# EAGLE board main (EAGLE 8.7.1)
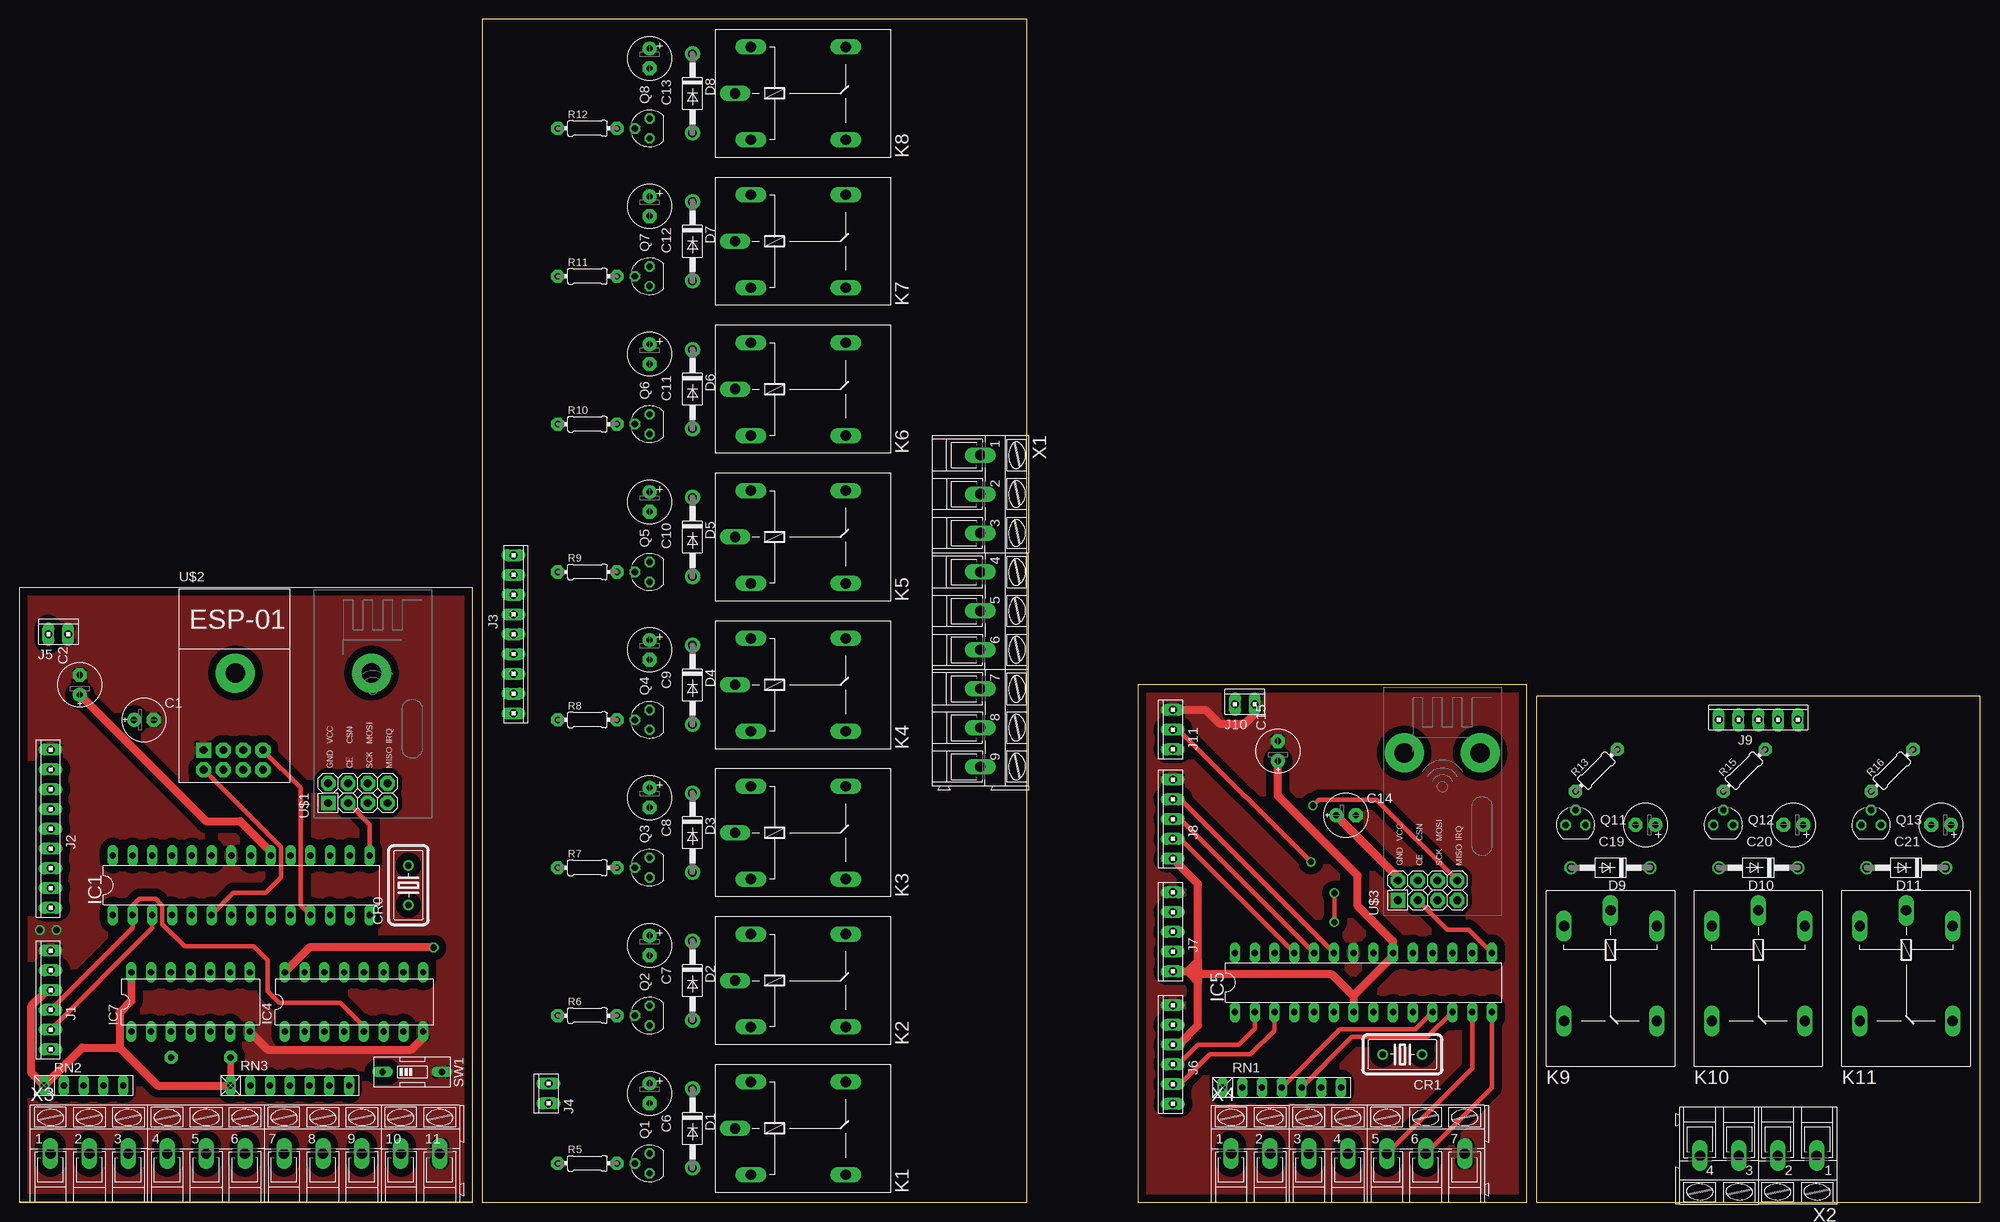
[diagram p0: board, top side]
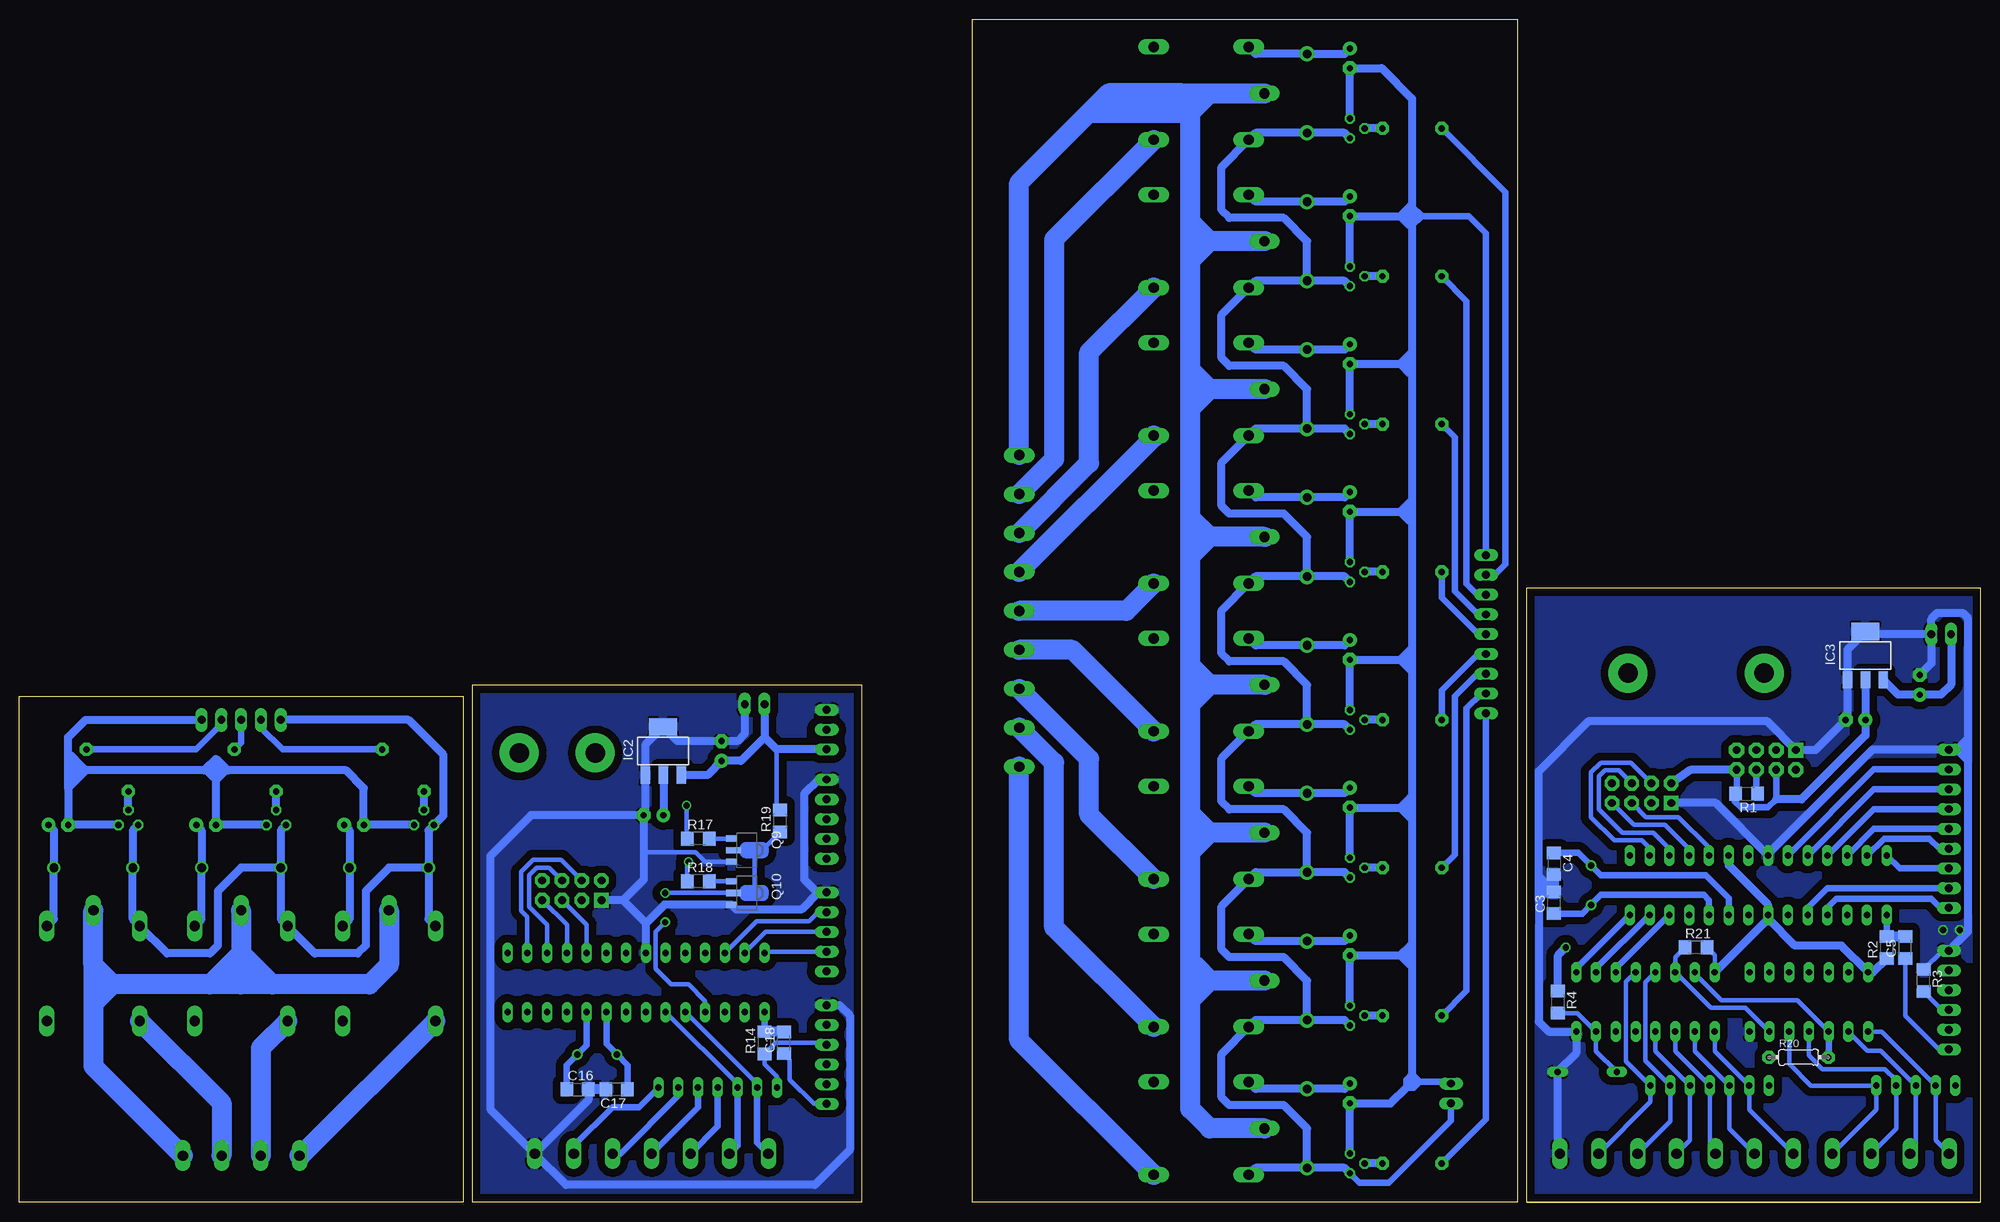
[diagram p1: board, bottom side, seen from below]

Size 252 x 152 mm. Coordinates in mm from the lower left corner, seen from the top.
Outline: 0,0 58.25,0
Outline: 58.25,0 0,0
Outline: 58.25,0 58.25,79 0,79 0,0
Outline: 129.5,0 129.5,152 59.5,152 59.5,0 129.5,0
Outline: 143.75,0 193.75,0 193.75,66.5 143.75,66.5 143.75,0
Outline: 195,0 252,0 252,65 195,65 195,0
Copper layers (1*16): Top 0.035mm / dielectric 1.5mm / Bottom 0.035mm
Design rules "default": minimum track width 6mil, minimum drill 0.35mm, track to track 6mil, track to pad 6mil, pad to pad 6mil, via to via 6mil, smd to smd 6mil, copper to edge 40mil, drill to drill 6mil, minimum pad ring 10mil, minimum via ring 8mil, stop-mask expansion 4mil, vias tented up to drill 0mil, thermal gap 10mil

## Footprints (pad centres in the part's own frame; a part is rotated, then mirrored left to right if it is on the bottom)
E2,5-6E = drill 0.813 pad 1.778: + -1.27,0 | drill 0.813 pad 1.778 octagon: - 1.27,0
C1206 = smd 1.6 x 1.8: 1 -1.4,0; 2 1.4,0
E2,5-6 = drill 0.813 pad 1.778: + -1.27,0 | drill 0.813 pad 1.778 octagon: - 1.27,0
HC18U-V = drill 0.813: 1 -2.54,0; 2 2.54,0
DO41-10 = drill 1.118 pad 1.93: A 5.08,0; C -5.08,0
DO41-10' = drill 1.118: A 5.08,0; C -5.08,0
DIL28-3 = drill 0.813 long: 1 -16.51,-3.81; 2 -13.97,-3.81; 3 -11.43,-3.81; 4 -8.89,-3.81; 5 -6.35,-3.81; 6 -3.81,-3.81; 7 -1.27,-3.81; 8 1.27,-3.81; 9 3.81,-3.81; 10 6.35,-3.81; 11 8.89,-3.81; 12 11.43,-3.81; 13 13.97,-3.81; 14 16.51,-3.81; 15 16.51,3.81; 16 13.97,3.81; 17 11.43,3.81; 18 8.89,3.81; 19 6.35,3.81; 20 3.81,3.81; 21 1.27,3.81; 22 -1.27,3.81; 23 -3.81,3.81; 24 -6.35,3.81; 25 -8.89,3.81; 26 -11.43,3.81; 27 -13.97,3.81; 28 -16.51,3.81
SOT223 = smd 1.219 x 2.235: 1 -2.311,-3.099; 2 0,-3.099; 3 2.311,-3.099 | smd 3.6 x 2.2: TAB 0,3.099
DIL16 = drill 0.813 long: 1 -8.89,-3.81; 2 -6.35,-3.81; 3 -3.81,-3.81; 4 -1.27,-3.81; 5 1.27,-3.81; 6 3.81,-3.81; 7 6.35,-3.81; 8 8.89,-3.81; 9 8.89,3.81; 10 6.35,3.81; 11 3.81,3.81; 12 1.27,3.81; 13 -1.27,3.81; 14 -3.81,3.81; 15 -6.35,3.81; 16 -8.89,3.81
DIL14 = drill 0.813 long: 1 -7.62,-3.81; 2 -5.08,-3.81; 3 -2.54,-3.81; 4 0,-3.81; 5 2.54,-3.81; 6 5.08,-3.81; 7 7.62,-3.81; 8 7.62,3.81; 9 5.08,3.81; 10 2.54,3.81; 11 0,3.81; 12 -2.54,3.81; 13 -5.08,3.81; 14 -7.62,3.81
10X06MTA = drill 1.016 long: 1 6.35,0; 2 3.81,0; 3 1.27,0; 4 -1.27,0; 5 -3.81,0; 6 -6.35,0
10X09MTA = drill 1.016 long: 1 10.16,0; 2 7.62,0; 3 5.08,0; 4 2.54,0; 5 0,0; 6 -2.54,0; 7 -5.08,0; 8 -7.62,0; 9 -10.16,0
10X02MTA = drill 1.016 long: 1 1.27,0; 2 -1.27,0
10X05MTA = drill 1.016 long: 1 5.08,0; 2 2.54,0; 3 0,0; 4 -2.54,0; 5 -5.08,0
10X03MTA = drill 1.016 long: 1 2.54,0; 2 0,0; 3 -2.54,0
G5LE = drill 1.321 long: 1 -7.493,-5.969; 2 -7.493,5.969; O 4.699,5.969; P -9.525,0; S 4.699,-5.969
SOT54A = drill 0.813 octagon: B 0,1.905; C -1.27,0; E 1.27,0
SOT89-BCE = smd 0.8 x 1.4: B -1.499,-1.981; E 1.499,-1.981 | smd 0.8 x 1.9: C 0,-1.727
R1206 = smd 1.6 x 1.803: 1 -1.422,0; 2 1.422,0
0204/7 = drill 0.813 pad 1.676 octagon: 1 -3.81,0; 2 3.81,0
RN-7 = drill 0.813 long: 1 -7.62,0; 2 -5.08,0; 3 -2.54,0; 4 0,0; 5 2.54,0; 6 5.08,0; 7 7.62,0
RN-5 = drill 0.813 long: 1 -5.08,0; 2 -2.54,0; 3 0,0; 4 2.54,0; 5 5.08,0
EDG-01 = drill 0.813 long: 1 0,-3.81; 2 0,3.81
NRF24L01+ = drill 1.016 pad 1.88 octagon: CE -11.43,1.27; CSN -8.89,1.27; IRQ -8.89,-3.81; MISO -11.43,-3.81; MOSI -8.89,-1.27; SCK -11.43,-1.27; VCC -8.89,3.81 | drill 1.016 pad 1.88 square: GND -11.43,3.81
ESP01 = drill 1 pad 1.93 octagon: CH_PD -1.285,-8.178; GPIO0 1.255,-5.638; GPIO2 -1.285,-5.638; RST 1.255,-8.178; RX 3.795,-5.638; TX -3.825,-8.178; VCC 3.795,-8.178 | drill 1 pad 1.93 square: GND -3.825,-5.638
AK300/9 = drill 1.321 long: 1 -20.015,0; 2 -15.011,0; 3 -10.008,0; 4 -5.004,0; 5 0,0; 6 5.004,0; 7 10.008,0; 8 15.011,0; 9 20.015,0
AK300/4 = drill 1.321 long: 1 -7.493,0; 2 -2.515,0; 3 2.515,0; 4 7.493,0
AK300/11 = drill 1.321 long: 1 -25.019,0; 2 -20.015,0; 3 -15.011,0; 4 -10.008,0; 5 -5.004,0; 6 0,0; 7 5.004,0; 8 10.008,0; 9 15.011,0; 10 20.015,0; 11 25.019,0
AK300/7 = drill 1.321 long: 1 -15.011,0; 2 -10.008,0; 3 -5.004,0; 4 0,0; 5 5.004,0; 6 10.008,0; 7 15.011,0

## Placement (x,y rotation side)
C1  [E2,5-6E]  16,62 0 top
C2  [E2,5-6E]  7.75,66.5 90 top
C3  [C1206]  54.75,38.5 90 bottom
C4  [C1206]  54.75,43.5 270 bottom
C5  [C1206]  9.62,32.75 90 bottom
C6  [E2,5-6]  81,14 270 top
C7  [E2,5-6]  81,33 270 top
C8  [E2,5-6]  81,52 270 top
C9  [E2,5-6]  81,71 270 top
C10  [E2,5-6]  81,90 270 top
C11  [E2,5-6]  81,109 270 top
C12  [E2,5-6]  81,128 270 top
C13  [E2,5-6]  81,147 270 top
C14  100uF  [E2,5-6E]  170.5,49.75 0 top
C15  10uF  [E2,5-6E]  161.75,58 90 top
C16  [C1206]  180.25,14.5 0 bottom
C17  [C1206]  175.25,14.5 180 bottom
C18  100nF  [C1206]  153.75,20.5 90 bottom
C19  [E2,5-6]  209,48.5 180 top
C20  [E2,5-6]  228,48.5 180 top
C21  [E2,5-6]  247,48.5 180 top
CR0  16MHz  [HC18U-V]  50,40.75 90 top
CR1  16MHz  [HC18U-V]  177.75,19 180 top
D1  1N4004  [DO41-10]  86.5,9.5 270 top
D2  1N4004  [DO41-10]  86.5,28.5 270 top
D3  1N4004  [DO41-10]  86.5,47.5 270 top
D4  1N4004  [DO41-10]  86.5,66.5 270 top
D5  1N4004  [DO41-10]  86.5,85.5 270 top
D6  1N4004  [DO41-10]  86.5,104.5 270 top
D7  1N4004  [DO41-10]  86.5,123.5 270 top
D8  1N4004  [DO41-10]  86.5,142.5 270 top
D9  1N4004  [DO41-10']  204.5,43 180 top
D10  1N4004  [DO41-10']  223.5,43 180 top
D11  1N4004  [DO41-10']  242.5,43 180 top
IC1  ATMEGA328-20P  [DIL28-3]  28.5,40.75 0 top
IC2  LM1117IMPX-3.3  [SOT223]  169.25,58 0 bottom
IC3  LM1117IMPX-3.3  [SOT223]  14.75,70.25 0 bottom
IC4  74LS151N  [DIL16]  43,25.75 0 top
IC5  ATMEGA328-20P  [DIL28-3]  172.75,28.25 0 top
IC7  74LS86N  [DIL14]  22,25.75 0 top
J1  [10X06MTA]  4,26 90 top
J2  [10X09MTA]  4,48 90 top
J3  [10X09MTA]  63.5,73 270 top
J4  [10X02MTA]  68,14 90 top
J5  [10X02MTA]  5,73 0 top
J6  [10X06MTA]  148.25,19 90 top
J7  [10X05MTA]  148.25,34.75 90 top
J8  [10X05MTA]  148.25,49.25 90 top
J9  [10X05MTA]  223.5,62 0 top
J10  [10X02MTA]  157.5,64 0 top
J11  [10X03MTA]  148.25,60.75 90 top
K1  G5L  [G5LE]  101.5,9.5 0 top
K2  G5L  [G5LE]  101.5,28.5 0 top
K3  G5L  [G5LE]  101.5,47.5 0 top
K4  G5L  [G5LE]  101.5,66.5 0 top
K5  G5L  [G5LE]  101.5,85.5 0 top
K6  G5L  [G5LE]  101.5,104.5 0 top
K7  G5L  [G5LE]  101.5,123.5 0 top
K8  G5L  [G5LE]  101.5,142.5 0 top
K9  G5L  [G5LE]  204.5,28 270 top
K10  G5L  [G5LE]  223.5,28 270 top
K11  G5L  [G5LE]  242.5,28 270 top
Q1  BC547  [SOT54A]  81,5 90 top
Q2  BC547  [SOT54A]  81,24 90 top
Q3  BC547  [SOT54A]  81,43 90 top
Q4  BC547  [SOT54A]  81,62 90 top
Q5  BC547  [SOT54A]  81,81 90 top
Q6  BC547  [SOT54A]  81,100 90 top
Q7  BC547  [SOT54A]  81,119 90 top
Q8  BC547  [SOT54A]  81,138 90 top
Q9  [SOT89-BCE]  158.5,45.25 270 bottom
Q10  [SOT89-BCE]  158.5,39.75 270 bottom
Q11  BC547  [SOT54A]  200,48.5 0 top
Q12  BC547  [SOT54A]  219,48.5 0 top
Q13  BC547  [SOT54A]  238,48.5 0 top
R1  [R1206]  30,52.5 180 bottom
R2  [R1206]  12,32.75 90 bottom
R3  [R1206]  7.25,28.5 270 bottom
R4  [R1206]  54.25,25.75 270 bottom
R5  [0204/7]  73,5 0 top
R6  [0204/7]  73,24 0 top
R7  [0204/7]  73,43 0 top
R8  [0204/7]  73,62 0 top
R9  [0204/7]  73,81 0 top
R10  [0204/7]  73,100 0 top
R11  [0204/7]  73,119 0 top
R12  [0204/7]  73,138 0 top
R13  [0204/7]  202.69,55.5 45 top
R14  [R1206]  156.25,20.5 90 bottom
R15  [0204/7]  221.69,55.5 45 top
R16  [0204/7]  240.69,55.5 45 top
R17  [R1206]  164.75,46.75 0 bottom
R18  [R1206]  164.75,41.25 0 bottom
R19  [R1206]  154.25,49 90 bottom
R20  [0204/7]  23.32,18.62 0 bottom
R21  [R1206]  36.5,32.75 0 bottom
RN1  [RN-7]  162.25,14.75 0 top
RN2  [RN-5]  8.25,15 0 top
RN3  [RN-7]  34.75,15 0 top
SW1  [EDG-01]  50.5,16.75 270 top
U$1  NRF24L01+  [NRF24L01+]  43.5,62.75 90 top
U$2  ESP01  [ESP01]  27.5,63.75 0 top
U$3  NRF24L01+  [NRF24L01+]  181,50.25 90 top
X1  [AK300/9]  123.5,76 270 top
X2  [AK300/4]  223.5,6 180 top
X3  [AK300/11]  29,6.25 0 top
X4  [AK300/7]  170.75,6.25 0 top

## Library data of the parts
C1-C21 D1-D8 R1-R21 = adafruit
CR0 CR1 = adafruit; OC_FARNELL: unknown; OC_NEWARK: unknown
D9-D11 = diode
IC1 IC5 = atmega328
IC2 IC3 = lm1117
IC4 IC7 = 74xx-us
J1-J11 = con-amp
K1-K11 = relay; OC_FARNELL: unknown; OC_NEWARK: unknown
Q1-Q8 Q11-Q13 = transistor-small-signal
Q9 Q10 = transistor
RN1-RN3 = resistor-net; OC_FARNELL: unknown; OC_NEWARK: unknown
SW1 = special
U$1 U$3 = nrf24l01
U$2 = esp8266
X1-X4 = con-ptr500; OC_FARNELL: unknown; OC_NEWARK: unknown

## Nets
3V3: C1.+ IC3.2 R1.2 U$1.VCC U$2.CH_PD U$2.VCC
3V3@2: C14.+ IC2.2 U$3.VCC
5V: C2.+ IC1.7 IC1.20 IC3.3 IC4.16 IC7.14 J1.3 J5.2 R2.1 R4.1 R20.1 R21.2 RN2.1 RN3.1
5V@1: D1.A D2.A D3.A D4.A D5.A D6.A D7.A D8.A J4.2 K1.1 K2.1 K3.1 K4.1 K5.1 K6.1 K7.1 K8.1 Q1.C Q2.C Q3.C Q4.C Q5.C Q6.C Q7.C Q8.C
5V@2: C15.+ IC2.3 IC5.7 IC5.20 J6.3 J7.5 J8.5 J10.2 J11.3 R14.1 R19.2 RN1.1
5V@2R: D9.A D10.A D11.A J9.5 K9.1 K10.1 K11.1 Q11.C Q12.C Q13.C
CE: IC1.15 U$1.CE
CE2: IC5.15 U$3.CE
CR1: C4.1 CR0.2 IC1.9
CR2: C3.1 CR0.1 IC1.10
CR3: C16.1 CR1.1 IC5.10
CR4: C17.1 CR1.2 IC5.9
CSN: IC1.16 U$1.CSN
CSN2: IC5.16 U$3.CSN
DTR: C5.1 J1.6
DTR2: C18.1 J6.6
ERST: R1.1 U$2.RST
FSW1: IC7.1 RN2.2 X3.1
FSW2: IC7.2 RN2.3 X3.2
GND: C1.- C2.- C3.2 C4.2 IC1.22 IC3.1 IC3.TAB IC4.8 IC7.7 J1.1 J2.1 J5.1 R3.1 SW1.2 U$1.GND U$2.GND X3.11
GND@1: C6.- C7.- C8.- C9.- C10.- C11.- C12.- C13.- J3.9 J4.1 Q1.E Q2.E Q3.E Q4.E Q5.E Q6.E Q7.E Q8.E
GND@2: C14.- C15.- C16.2 C17.2 IC2.1 IC2.TAB IC5.22 J6.1 J7.1 J8.1 J10.1 J11.1 Q9.E Q10.E U$3.GND X4.7
GND@2R: C19.- C20.- C21.- J9.1 Q11.E Q12.E Q13.E
IRQ: R17.1 U$3.IRQ
IRQ+PIR: IC5.4 Q9.C Q10.C R19.1
LIVE: K1.P K2.P K3.P K4.P K5.P K6.P K7.P K8.P X1.1
MEN: IC4.7 R4.2 SW1.1
MISO: IC1.18 U$1.MISO
MISO2: IC5.18 U$3.MISO
MOSI: IC1.17 U$1.MOSI
MOSI2: IC5.17 U$3.MOSI
MRST: C5.2 IC1.1 R2.2
MRST1: C18.2 IC5.1 R14.2
N$1: K9.P K10.P K11.P X2.1
N$2: Q1.B R5.2
N$3: Q2.B R6.2
N$4: Q3.B R7.2
N$5: Q4.B R8.2
N$6: Q5.B R9.2
N$7: Q6.B R10.2
N$8: Q7.B R11.2
N$9: Q8.B R12.2
N$10: J3.1 R5.1
N$11: J3.8 R12.1
N$12: J3.7 R11.1
N$13: J3.6 R10.1
N$14: J3.5 R9.1
N$15: J3.4 R8.1
N$16: J3.3 R7.1
N$17: J3.2 R6.1
N$18: K1.S X1.9
N$19: K8.S X1.2
N$20: K7.S X1.3
N$21: K6.S X1.4
N$22: K5.S X1.5
N$23: K4.S X1.6
N$24: K3.S X1.7
N$25: K2.S X1.8
N$27: C19.+ D9.C K9.2
N$28: C7.+ D2.C K2.2
N$29: C8.+ D3.C K3.2
N$30: C9.+ D4.C K4.2
N$31: C10.+ D5.C K5.2
N$32: C11.+ D6.C K6.2
N$33: C12.+ D7.C K7.2
N$34: C13.+ D8.C K8.2
N$35: C6.+ D1.C K1.2
N$36: K10.S X2.3
N$37: C20.+ D10.C K10.2
N$38: K9.S X2.4
N$39: C21.+ D11.C K11.2
N$40: K11.S X2.2
N$41: Q11.B R13.1
N$42: Q13.B R16.1
N$43: Q12.B R15.1
N$44: J9.3 R15.2
N$45: J9.4 R13.2
N$46: J9.2 R16.2
N$49: Q9.B R17.2
N$50: Q10.B R18.2
PIR: J11.2 R18.1
PRX: IC1.3 J1.5
PRX2: IC5.3 J6.5
PTX2: IC5.2 J6.4
PTX+SWS: IC1.2 IC4.5 J1.4 R3.2
RELAY1: IC1.4 J2.9
RELAY2: IC1.5 J2.8
RELAY3: IC1.28 J2.7
RELAY4: IC1.27 J2.6
RELAY5: IC1.26 J2.5
RELAY6: IC1.25 J2.4
RELAY7: IC1.24 J2.3
RELAY8: IC1.23 J2.2
RELAY21: IC5.28 J7.4
RELAY22: IC5.27 J7.3
RELAY23: IC5.26 J7.2
RELAY24: IC5.25 J8.4
RELAY25: IC5.24 J8.3
RELAY26: IC5.23 J8.2
RX: IC1.11 U$2.RX
S1: IC1.12 IC4.11
S2: IC1.13 IC4.10
S3: IC1.14 IC4.9
S21: IC5.5 RN1.2 X4.1
S22: IC5.6 RN1.3 X4.2
S23: IC5.11 RN1.4 X4.3
S24: IC5.12 RN1.5 X4.4
S25: IC5.13 RN1.6 X4.5
S26: IC5.14 RN1.7 X4.6
SCK: IC1.19 U$1.SCK
SCK2: IC5.19 U$3.SCK
SW1: IC4.15 IC7.3 R20.2
SW2: IC4.14 IC7.6 R21.1
SW3: IC4.1 RN3.2 X3.5
SW4: IC4.2 RN3.3 X3.6
SW5: IC4.3 RN3.4 X3.7
SW6: IC4.4 RN3.5 X3.8
SW7: IC4.13 RN3.6 X3.9
SW8: IC4.12 RN3.7 X3.10
TSW1: IC7.4 RN2.4 X3.3
TSW2: IC7.5 RN2.5 X3.4
TX: IC1.6 U$2.TX

## Tracks (layer width: path | path; a pad name or v marks a point on that pad's centre or on a via)
3V3
  Bottom 0.813: U$2.VCC 31.3,52.38 | 31.3,52.38 R1.2 | U$2.CH_PD 26.21,51.78 27.25,50.75 30.75,50.75 31.5,51.5 31.3,51.7 31.3,52.38
  Bottom 1.016: IC3.2 14.73,67.13 C1.+ 14.73,60.02 22.96,51.78 26.21,51.78 | U$2.VCC 37.23,55.57 U$1.VCC
3V3@2
  Top 1.016: C14.+ 177.19,41.79 U$3.VCC
  Bottom 1.016: IC2.2 169.23,54.88 C14.+
5V  (via drill 0.8)
  Top 0.813: R20.1 RN3.1
  Top 1.016: v53.25,32.75 37.3,32.75 IC4.16 | 12.88,19.88 17.75,15 RN3.1 | C2.+ 23.98,49 28.38,49 32.31,45.06 IC1.20 | IC7.14 14.38,25.88 12.88,24.38 12.88,19.88 | J1.3 3.54,27.27 1.52,25.25 1.52,16.65 RN2.1 8.04,19.88 12.88,19.88
  Bottom 0.61: R21.2 34.11,31.78 IC4.16
  Bottom 1.016: J5.2 3.73,66.52 5.02,65.23 C2.+ 10.52,65.23 IC3.3 | R2.1 13.77,29.56 IC7.14 17.82,33 23.79,33 27.23,36.44 | IC1.20 32.31,43.31 27.23,38.23 IC1.7 27.23,36.44 | 27.23,36.44 IC4.16 | R4.1 54.25,31.75 v53.25,32.75
5V@1
  Bottom 0.813: Q1.C 79.77,2.5 76,2.5 68,10.5 J4.2
  Bottom 1.016: D1.A 93.12,4.42 K1.1 | D2.A 93.12,23.42 K2.1 97.5,19.04 97.5,13.5 96.5,12.5 89.5,12.5 86.5,9.5 D1.A | D3.A 93.12,42.42 K3.1 97.5,38.04 97.5,32.5 96.5,31.5 89.5,31.5 86.5,28.5 D2.A | D4.A 93.12,61.42 K4.1 97.5,57.04 97.5,51.5 96.5,50.5 89.5,50.5 86.5,47.5 D3.A | D5.A 93.12,80.42 K5.1 97.5,76.04 97.5,70.5 96.5,69.5 89.5,69.5 86.5,66.5 D4.A | D6.A 93.12,99.42 K6.1 97.5,95.04 97.5,89.5 96.5,88.5 89.5,88.5 86.5,85.5 D5.A | D7.A 93.12,118.42 K7.1 97.5,114.04 97.5,108.5 96.5,107.5 89.5,107.5 86.5,104.5 D6.A | Q8.C 81.69,137.42 D8.A 93.12,137.42 K8.1 97.5,133.04 97.5,127.5 96.5,126.5 89.5,126.5 86.5,123.5 D7.A | Q7.C 81.69,118.42 D7.A | Q6.C 81.69,99.42 D6.A | Q5.C 81.69,80.42 D5.A | Q4.C 81.69,61.42 D4.A | Q3.C 81.69,42.42 D3.A | Q2.C 81.69,23.42 D2.A | Q1.C 81.69,4.42 D1.A
5V@2
  Top 1.016: J7.5 150.17,29.67 | 150.17,29.67 151.5,31 | 151.5,31 151.5,40.92 J8.5 | J6.3 149.02,20.27 151.5,22.75 151.5,28.34 | 151.5,28.34 150.54,29.3 | 150.54,29.3 150.17,29.67 | 151.5,31 151.5,29.75 | 151.5,29.75 151.5,28.34 | 150.54,29.3 151.04,29.3 | 151.04,29.3 151.5,29.75 | 171.48,26.52 IC5.7 | 171.48,26.52 176.56,31.6 IC5.20 176.56,33.56 172,38.12 172,42 161.75,52.25 C15.+ | 171.48,26.52 168.71,29.3 151.04,29.3
  Bottom 0.61: J6.3 148.48,20.5 154.83,20.5 R14.1 156.25,17.75 154.63,16.13 RN1.1 | R19.2 154.67,50.84 154.67,58.21
  Bottom 1.016: J10.2 156.23,59.77 | 156.23,59.77 159.27,56.73 C15.+ 163.58,54.9 IC2.3 | J11.3 154.67,58.21 156.23,59.77
5V@2R
  Bottom 1.016: D9.A 199.42,36.38 K9.1 | D10.A 218.42,36.38 K10.1 214.04,32 208.5,32 207.5,33 207.5,40 204.5,43 D9.A | D10.A 223.5,43 226.5,40 226.5,33 227.5,32 233.04,32 K11.1 237.42,36.38 D11.A 237.42,47.81 Q13.C | D9.A 199.42,47.81 Q11.C 197.5,49.73 197.5,57.5 202,62 J9.5 | Q12.C 218.42,47.81 D10.A
CE
  Top 0.61: U$1.CE 45.01,48.54 IC1.15
CE2
  Top 0.61: U$3.CE 183.55,35 186.32,35 IC5.15
CR1
  Bottom 0.813: C4.1 51.61,44.9 CR0.2 48.71,42 35.25,42 32.31,39.06 IC1.9
CR2
  Bottom 0.813: C3.1 51.11,37.1 CR0.1 48.71,39.5 35.5,39.5 34.85,38.85 IC1.10
CR3
  Bottom 0.813: IC5.10 179.1,20.19 CR1.1 181.65,17.64 C16.1
CR4
  Bottom 0.813: IC5.9 176.56,20.35 CR1.2 173.85,17.64 C17.1
CSN
  Bottom 0.61: IC1.16 42.47,45.47 43.5,46.5 47,46.5 50,49.5 50,55.25 48.75,56.5 44.87,56.5 U$1.CSN
CSN2
  Bottom 0.61: U$3.CSN 182.37,44 186,44 187.5,42.5 187.5,37.5 186.72,36.72 IC5.16
DTR
  Bottom 0.61: J1.6 5.28,19.65 9.62,24 C5.1
DTR2
  Bottom 0.61: J6.6 149.9,12.65 153,15.75 153,18.35 C18.1
ERST
  Bottom 0.813: U$2.RST 28.75,52.43 R1.1
FSW1
  Bottom 0.61: X3.1 5.71,7.98 RN2.2 12.65,21.94 IC7.1
FSW2
  Bottom 0.61: X3.2 8.25,6.99 RN2.3 12.75,19.5 14.48,19.5 IC7.2
GND  (via drill 0.8)
  Top 1.016: IC7.7 31.93,19.62 50.38,19.62 51.89,21.14 IC4.8
  Bottom 0.61: J1.1 4.82,32.35 R3.1
  Bottom 1.016: J5.1 6.27,69.25 C2.- | J5.1 14.4,73 IC3.TAB 17.06,71.04 IC3.1 17.06,62.21 C1.- 21.16,58.11 U$2.GND 27.44,61.88 50.25,61.88 56.73,55.4 56.73,41.88 | X3.11 54.31,6.54 SW1.2 51.89,19.17 IC4.8 55.44,21.94 56.73,23.23 56.73,39.02 | J5.1 6.27,74.98 5.5,75.75 2.25,75.75 1.52,75.02 1.52,59.64 | 54.75,41 56.73,39.02 | J1.1 1.52,34.83 1.52,56.75 | 1.52,56.75 1.52,58.25 | 1.52,58.25 1.52,59.64 | J2.1 3,58.16 | 3,58.16 1.61,58.16 1.52,58.25 | 1.52,59.64 3,58.16 | J2.1 2.93,58.16 1.52,56.75 | J2.1 13.84,58.16 27.23,44.77 | U$1.GND 33.99,51.32 IC1.22 | 56.73,39.02 56.73,40.5 | 56.73,40.5 56.73,41.88 | 56.73,41.88 C3.2 55.35,40.5 56.73,40.5
  Bottom 1.27: C4.2 54.75,41 C3.2
  other vias: 2.62,35 4.75,35
  pour Bottom (isolate 1): 0,79 58.25,79 58.25,0 0,0
  pour Top (isolate 1): 0,79 58.25,79 58.25,0 0,0
GND@1
  Bottom 0.813: J3.9 63.5,124.5 65.73,126.73 71.77,126.73 | 71.77,126.73 73.23,126.73 | 73,125.5 71.77,126.73 | 73,128 71.77,126.77 71.77,126.73 | J4.1 68.23,15.5 72,15.5 | 72,15.5 73,15.5 | 72,15.5 73,16.5 73.75,15.75 73.75,14.75 72.75,14.75 72,15.5
  Bottom 1.016: Q1.E C6.- 75.77,12.73 73.75,14.75 73,15.5 73,16.5 73,30.5 | Q2.E C7.- 74.5,31.73 | Q3.E C8.- 74.5,50.73 | Q4.E C9.- 74.5,69.73 | Q5.E C10.- 74.5,88.73 | Q6.E C11.- 74.5,107.73 | Q7.E C12.- 74.5,126.73 | Q8.E C13.- 76.89,145.73 73,141.84 73,128 | 73,128 73,126.5 | 73,126.5 73,125.5 | 73,125.5 73,109.23 | 73,109.23 73,107.5 | 73,107.5 73,106.5 | 73,106.5 73,90.23 | 73,90.23 73,88.5 | 73,88.5 73,87.5 | 73,87.5 73,71.23 | 73,71.23 73,69.5 | 73,69.5 73,68.23 | 73,68.23 73,52 | 73,52 73,50.5 | 73,50.5 73,49.23 | 73,49.23 73,33 | 73,33 73,31.5 | 73,31.5 73,30.5 | 74.5,31.73 73.23,31.73 73,31.5 | 74.5,50.73 73.23,50.73 73,50.5 | 74.5,69.73 73.23,69.73 73,69.5 | 74.5,88.73 73.23,88.73 73,88.5 | 74.5,107.73 73.23,107.73 73,107.5 | 74.5,126.73 73.23,126.73 73,126.5 | 74.5,126.73 73.27,125.5 73,125.5 | 74.5,126.73 73.23,128 73,128 | 74.5,107.73 73.27,106.5 73,106.5 | 74.5,107.73 73,109.23 | 74.5,88.73 73,90.23 | 74.5,88.73 73.27,87.5 73,87.5 | 74.5,69.73 73,71.23 | 74.5,69.73 73,68.23 | 74.5,50.73 73.23,52 73,52 | 74.5,50.73 73,49.23 | 74.5,31.73 73.23,33 73,33 | 74.5,31.73 73.27,30.5 73,30.5
GND@2
  Top 1.016: J11.1 152.46,63.29 154.25,61.5 157.5,61.5 158.77,62.77 J10.1
  Bottom 0.61: Q9.E 163.88,43.75 165.12,45 171.77,45
  Bottom 1.016: J10.1 158.77,60.23 159.73,59.27 C15.- 167.42,59.27 IC2.TAB 171.56,58.79 IC2.1 171.56,49.96 C14.- | C14.- 171.77,45 171.77,41.48 174.43,38.82 | 174.43,38.82 U$3.GND | IC5.22 171.48,35.87 | 171.48,35.87 174.43,38.82 | C16.2 178.85,13.16 X4.7 | C14.- 186.25,49.75 191.5,44.5 191.5,11.99 X4.7 | 171.48,35.87 169.1,38.25 Q10.E 159.85,37.62 151.5,37.62 149.29,39.83 J7.1 149.46,39.83 151.12,41.5 151.12,52.5 149.29,54.33 J8.1 | J6.1 146.6,25.35 145.27,24.02 145.27,6.73 149.75,2.25 181.76,2.25 X4.7
  Bottom 1.27: C17.2 C16.2
  pour Bottom (isolate 1): 143.75,66.5 193.75,66.5 193.75,0 143.75,0
  pour Top (isolate 1): 143.75,66.5 193.75,66.5 193.75,0 143.75,0
GND@2R
  Bottom 1.016: Q11.E C19.- 207.73,53.23 210,55.5 225.23,55.5 | Q12.E C20.- 226.73,54.27 | Q13.E C21.- 245.73,53.27 | 225.23,55.5 226,55.5 | 226,55.5 228.23,55.5 | 228.23,55.5 243.5,55.5 | 243.5,55.5 245.73,53.27 | 226.73,54.27 226.73,55.77 | 226.73,55.77 226,55.5 | 226.73,54.27 225.5,55.5 | 226.73,54.27 227.96,55.5 | 226.73,57 226.73,55.77 | 226.73,57 225.23,55.5 | 226.73,57 228.23,55.5 | 245.73,53.27 245.73,55 | 245.73,55 245.73,56.5 | 245.73,56.5 245.73,57.5 | 245.73,57.5 245.73,59.77 243.5,62 J9.1 | 243.5,55.5 244,56 | 244,56 245.5,57.5 245.73,57.5 | 244,56 244.5,55.5 | 244.5,55.5 245,55 245.73,55 | 244.5,55.5 245.5,56.5 245.73,56.5
IRQ  (via drill 0.8)
  Top 0.61: U$3.IRQ 174.42,51.75 167,51.75 v166.25,51
  Bottom 0.61: v166.25,51 166.25,46.83 R17.1
IRQ+PIR  (via drill 0.8)
  Top 0.61: v169,36 v169,39.75
  Bottom 0.61: Q9.C 157.5,45.25 | 157.5,45.25 157.5,39.75 Q10.C v169,39.75 | R19.1 156.58,45.25 157.5,45.25 | IC5.4 163.86,25.86 166,28 168.25,28 170.25,30 170.25,34.75 v169,36
LIVE
  Bottom 2.54: K1.P 99,9.5 101.5,12 101.5,26 | 101.5,26 101.5,28.5 | 101.5,47.5 101.5,50 | 101.5,50 101.5,64 | 101.5,64 101.5,66 | 101.5,66 101.5,69 | 101.5,69 101.5,83 | 101.5,83 101.5,85 | 101.5,85 101.5,88 | 101.5,88 101.5,102 | 101.5,102 101.5,104.5 | 101.5,104.5 101.5,107 | 101.5,107 101.5,121 | 101.5,121 101.5,123.5 | 101.5,123.5 101.5,125.5 | 101.5,125.5 101.5,140 | 101.5,140 99,142.5 | 99,142.5 K8.P | X1.1 123.5,131 114.5,140 | 114.5,140 105,140 | 105,140 101.5,140 | 105,140 102.5,142.5 | 102.5,142.5 99,142.5 | 102.5,142.5 112,142.5 114.5,140 | K2.P 99,28.5 | 99,28.5 101.5,28.5 | K3.P 99,47.5 | 99,47.5 101.5,47.5 | K4.P 99,66.5 | 99,66.5 101,66.5 101.5,66 | K5.P 99,85.5 | 99,85.5 101,85.5 101.5,85 | K6.P 99,104.5 | 99,104.5 101.5,104.5 | K7.P 99,123.5 | 99,123.5 101.5,123.5 | 101.5,28.5 101.5,30.5 | 101.5,30.5 101.5,45 | 101.5,45 101.5,47.5 | 99,47.5 101.5,45 | 99,66.5 101.5,64 | 99,47.5 101.5,50 | 99,66.5 101.5,69 | 99,85.5 101.5,83 | 99,85.5 101.5,88 | 99,104.5 101.5,102 | 99,104.5 101.5,107 | 99,123.5 101.5,121 | 99,123.5 101,125.5 101.5,125.5 | 99,28.5 101.5,26 | 99,28.5 101,30.5 101.5,30.5
MEN
  Bottom 0.61: SW1.1 49.35,19.41 IC4.7 51.74,24.33 R4.2
MISO
  Bottom 0.61: IC1.18 37.39,45.39 40.5,48.5 44.49,48.5 U$1.MISO
MISO2
  Bottom 0.61: U$3.MISO 181.64,35.65 IC5.18
MOSI
  Bottom 0.61: U$1.MOSI 46.41,55.5 48.25,55.5 49,54.75 49,50.5 46,47.5 42,47.5 39.93,45.43 IC1.17
MOSI2
  Bottom 0.61: IC5.17 184.18,35.68 186.5,38 186.5,42 185.5,43 183.91,43 U$3.MOSI
MRST
  Bottom 0.61: 11.96,34.15 11.99,34.18
  Bottom 0.813: R2.2 11.99,34.18 IC1.1
  Bottom 1.27: C5.2 11.96,34.15
MRST1
  Bottom 0.813: IC5.1 156.24,21.93 R14.2
  Bottom 1.27: C18.2 156.21,21.9 156.24,21.93
N$1
  Bottom 2.54: K9.P 204.5,30.5 207,28 219.5,28 | 219.5,28 223.5,28 | 223.5,28 227.5,28 | 227.5,28 240,28 | 242.5,30.5 K11.P | 240,28 242.5,30.5 | K10.P 223.5,32 | 223.5,32 223.5,28 | 223.5,32 219.5,28 | 223.5,32 227.5,28 | 242.5,30.5 242.5,25.5 | 242.5,25.5 242.5,17.51 X2.1 | 240,28 242.5,25.5
N$2
  Bottom 1.016: R5.2 Q1.B
N$3
  Bottom 1.016: R6.2 Q2.B
N$4
  Bottom 1.016: R7.2 Q3.B
N$5
  Bottom 1.016: R8.2 Q4.B
N$6
  Bottom 1.016: R9.2 Q5.B
N$7
  Bottom 1.016: R10.2 Q6.B
N$8
  Bottom 1.016: R11.2 Q7.B
N$9
  Bottom 1.016: R12.2 Q8.B
N$10
  Bottom 0.813: R5.1 63.5,10.69 J3.1
N$11
  Bottom 0.813: J3.8 62.38,80.62 61,82 61,129.81 R12.1
N$12
  Bottom 0.813: J3.7 64.58,78.08 66,79.5 66,115.81 R11.1
N$13
  Bottom 0.813: J3.6 64.54,75.54 67.5,78.5 67.5,98.31 R10.1
N$14
  Bottom 0.813: J3.5 64.5,73 69.19,77.69 R9.1
N$15
  Bottom 0.813: R8.1 69.19,65.81 64.54,70.46 J3.4
N$16
  Bottom 0.813: R7.1 67.5,44.69 67.5,65 64.58,67.92 J3.3
N$17
  Bottom 0.813: R6.1 66,27.19 66,63.5 64.12,65.38 J3.2
N$18
  Bottom 2.54: K1.S 123.5,20.83 X1.9
N$19
  Bottom 2.54: K8.S 119,123.73 119,95.51 X1.2
N$20
  Bottom 2.54: X1.3 114.5,95.01 114.5,109.23 K7.S
N$21
  Bottom 2.54: X1.4 106.2,98.31 K6.S
N$22
  Bottom 2.54: K5.S 109.73,76 X1.5
N$23
  Bottom 2.54: K4.S 116.66,71 X1.6
N$24
  Bottom 2.54: K3.S 114.5,49.83 114.5,56.99 X1.7
N$25
  Bottom 2.54: K2.S 119,35.33 119,56.49 X1.8
N$26  (via drill 2.5 pad 5)
  other vias: 27.75,68
N$27
  Bottom 1.016: K9.2 209.58,36.38 D9.C 209.58,47.81 C19.+
N$28
  Bottom 1.016: K2.2 93.12,33.58 D2.C 81.69,33.58 C7.+
N$29
  Bottom 1.016: K3.2 93.12,52.58 D3.C 81.69,52.58 C8.+
N$30
  Bottom 1.016: K4.2 93.12,71.58 D4.C 81.69,71.58 C9.+
N$31
  Bottom 1.016: K5.2 93.12,90.58 D5.C 81.69,90.58 C10.+
N$32
  Bottom 1.016: K6.2 93.12,109.58 D6.C 81.69,109.58 C11.+
N$33
  Bottom 1.016: K7.2 93.12,128.58 D7.C 81.69,128.58 C12.+
N$34
  Bottom 1.016: K8.2 93.12,147.58 D8.C 81.69,147.58 C13.+
N$35
  Bottom 1.016: K1.2 93.12,14.58 D1.C 81.69,14.58 C6.+
N$36
  Bottom 2.54: K10.S 220.99,19.85 X2.3
N$37
  Bottom 1.016: K10.2 228.58,36.38 D10.C 228.58,47.81 C20.+
N$38
  Bottom 2.54: K9.S 215.83,6 X2.4
N$39
  Bottom 1.016: K11.2 247.58,36.38 D11.C 247.58,47.81 C21.+
N$40
  Bottom 2.54: K11.S 226.01,12.79 X2.2
N$41
  Bottom 1.016: Q11.B R13.1
N$42
  Bottom 1.016: Q13.B R16.1
N$43
  Bottom 1.016: Q12.B R15.1
N$44
  Bottom 0.813: J9.3 223.5,59.08 R15.2
N$45
  Bottom 0.813: R13.2 218.19,58.19 221,61 220.96,61.04 J9.4
N$46
  Bottom 0.813: J9.2 226.04,61.46 229.31,58.19 R16.2
N$47  (via drill 2.5 pad 5)
  other vias: 45.25,68
N$48  (via drill 2.5 pad 5)
  other vias: 178,57.75
N$49
  Bottom 0.61: Q9.B R17.2
N$50
  Bottom 0.61: Q10.B R18.2
N$51  (via drill 2.5 pad 5)
  other vias: 187.75,57.75
PIR  (via drill 0.8)
  Top 0.61: J11.2 149,60.75 v166,43.75
  Bottom 0.61: v166,43.75 166.17,43.58 R18.1
PRX
  Top 0.61: J1.5 17.07,35.26 IC1.3
PRX2
  Top 0.61: J6.5 149.19,15.19 153,19 158.25,19 161.32,22.07 IC5.3
PTX2
  Top 0.61: J6.4 148.98,17.73 151.5,20.25 156.75,20.25 158.78,22.28 IC5.2
PTX+SWS
  Top 0.61: IC4.5 44.12,22.09 44.12,22.75 41.25,25.62 33.38,25.62 31.88,27.12 31.88,31.12 30.12,32.88 21.25,32.88 18.38,35.75 18.38,38.12 17.5,39 15.38,39 14.53,38.16 IC1.2 14.53,35.26 J1.4
  Bottom 0.61: J1.4 4.9,24.73 R3.2
RELAY1
  Bottom 0.813: J2.9 5.09,37.84 6.25,39 18.5,39 19.75,37.75 19.61,37.61 IC1.4
RELAY2
  Bottom 0.813: J2.8 19.62,40.38 22.15,37.85 IC1.5
RELAY3
  Bottom 0.813: J2.7 10.35,42.92 IC1.28
RELAY4
  Bottom 0.813: IC1.27 12.34,46.75 6.5,46.75 5.21,45.46 J2.6
RELAY5
  Bottom 0.813: J2.5 13.63,48 IC1.26
RELAY6
  Bottom 0.813: J2.4 13.63,50.54 IC1.25
RELAY7
  Bottom 0.813: J2.3 13.63,53.08 IC1.24
RELAY8
  Bottom 0.813: J2.2 13.63,55.62 IC1.23
RELAY21
  Bottom 0.61: J7.4 156.09,32.21 IC5.28
RELAY22
  Bottom 0.61: J7.3 156.09,34.75 IC5.27
RELAY23
  Bottom 0.61: J7.2 149.34,37.29 150.5,36.12 157.25,36.12 IC5.26
RELAY24
  Top 0.61: J8.4 149.21,46.71 IC5.25
RELAY25
  Top 0.61: J8.3 149.21,49.25 IC5.24
RELAY26
  Top 0.61: J8.2 149.21,51.79 IC5.23
RX
  Top 0.61: U$2.RX 36.12,53.28 36.12,38.2 IC1.11
S1
  Bottom 0.813: IC1.12 46.81,30.06 IC4.11
S2
  Bottom 0.813: IC1.13 49.35,30.06 IC4.10
S3
  Bottom 0.813: IC1.14 51.89,30.06 IC4.9
S21
  Bottom 0.61: IC5.5 157.17,15.21 RN1.2
  Bottom 0.813: RN1.2 157.17,7.68 X4.1
S22
  Bottom 0.61: IC5.6 159.71,15.21 RN1.3
  Bottom 0.813: RN1.3 159.71,7.28 X4.2
S23
  Top 0.61: RN1.4 169.75,22.25 179.45,22.25 IC5.11
  Bottom 0.813: RN1.4 162.25,9.75 X4.3
S24
  Top 0.61: IC5.12 180.99,21.25 171.29,21.25 RN1.5
  Bottom 0.813: RN1.5 164.79,12.21 X4.4
S25
  Top 0.61: IC5.13 186.72,17.22 X4.5
  Bottom 0.813: RN1.6 167.33,13.67 174.75,6.25 X4.5
S26
  Top 0.61: X4.6 189.26,14.75 IC5.14
  Bottom 0.813: RN1.7 172.37,12.25 175.75,12.25 180.76,7.24 X4.6
SCK
  Bottom 0.61: IC1.19 34.85,45.6 38.75,49.5 42.95,49.5 U$1.SCK
SCK2
  Bottom 0.61: U$3.SCK 179.1,35.65 IC5.19
SW1
  Bottom 0.61: IC7.3 23.52,26 33.25,26 36.65,29.4 IC4.15
  Bottom 0.813: IC7.3 19.46,18.68 R20.2
SW2
  Bottom 0.61: R21.1 39.19,31.48 IC4.14 34.63,25 30.14,25 IC7.6
SW3
  Bottom 0.61: X3.5 29.67,11.92 RN3.2 34.11,19.44 IC4.1
SW4
  Bottom 0.61: X3.6 32.21,9.46 RN3.3 36.65,19.44 IC4.2
SW5
  Bottom 0.61: X3.7 34.75,7 RN3.4 39.19,19.44 IC4.3
SW6
  Bottom 0.61: X3.8 37.29,7.97 RN3.5 41.73,19.44 IC4.4
SW7
  Bottom 0.61: X3.9 39.83,10.43 RN3.6 43,18.17 43,28.29 IC4.13
SW8
  Bottom 0.61: X3.10 42.37,12.89 RN3.7 45.5,18.13 45.5,28.33 IC4.12
TSW1
  Bottom 0.61: X3.3 10.79,9.45 RN2.4 10.79,15.66 12.25,17.12 20.25,17.12 22,18.88 IC7.4
TSW2
  Bottom 0.61: X3.4 13.33,11.91 RN2.5 21.75,15 24.54,17.79 IC7.5
TX
  Top 0.61: U$2.TX 33.62,45.62 33.62,41.75 31.62,39.75 27.5,39.75 IC1.6